# Altium PCB PCB1.PcbDoc
Units mil, origin at the board's own origin, x right, y up, seen from the top; angles counter-clockwise.
Board outline 1770 x 1750 mil, 2 copper layers (Top Layer, Bottom Layer); 34 components, 20 nets, 75 pads, 4 vias.
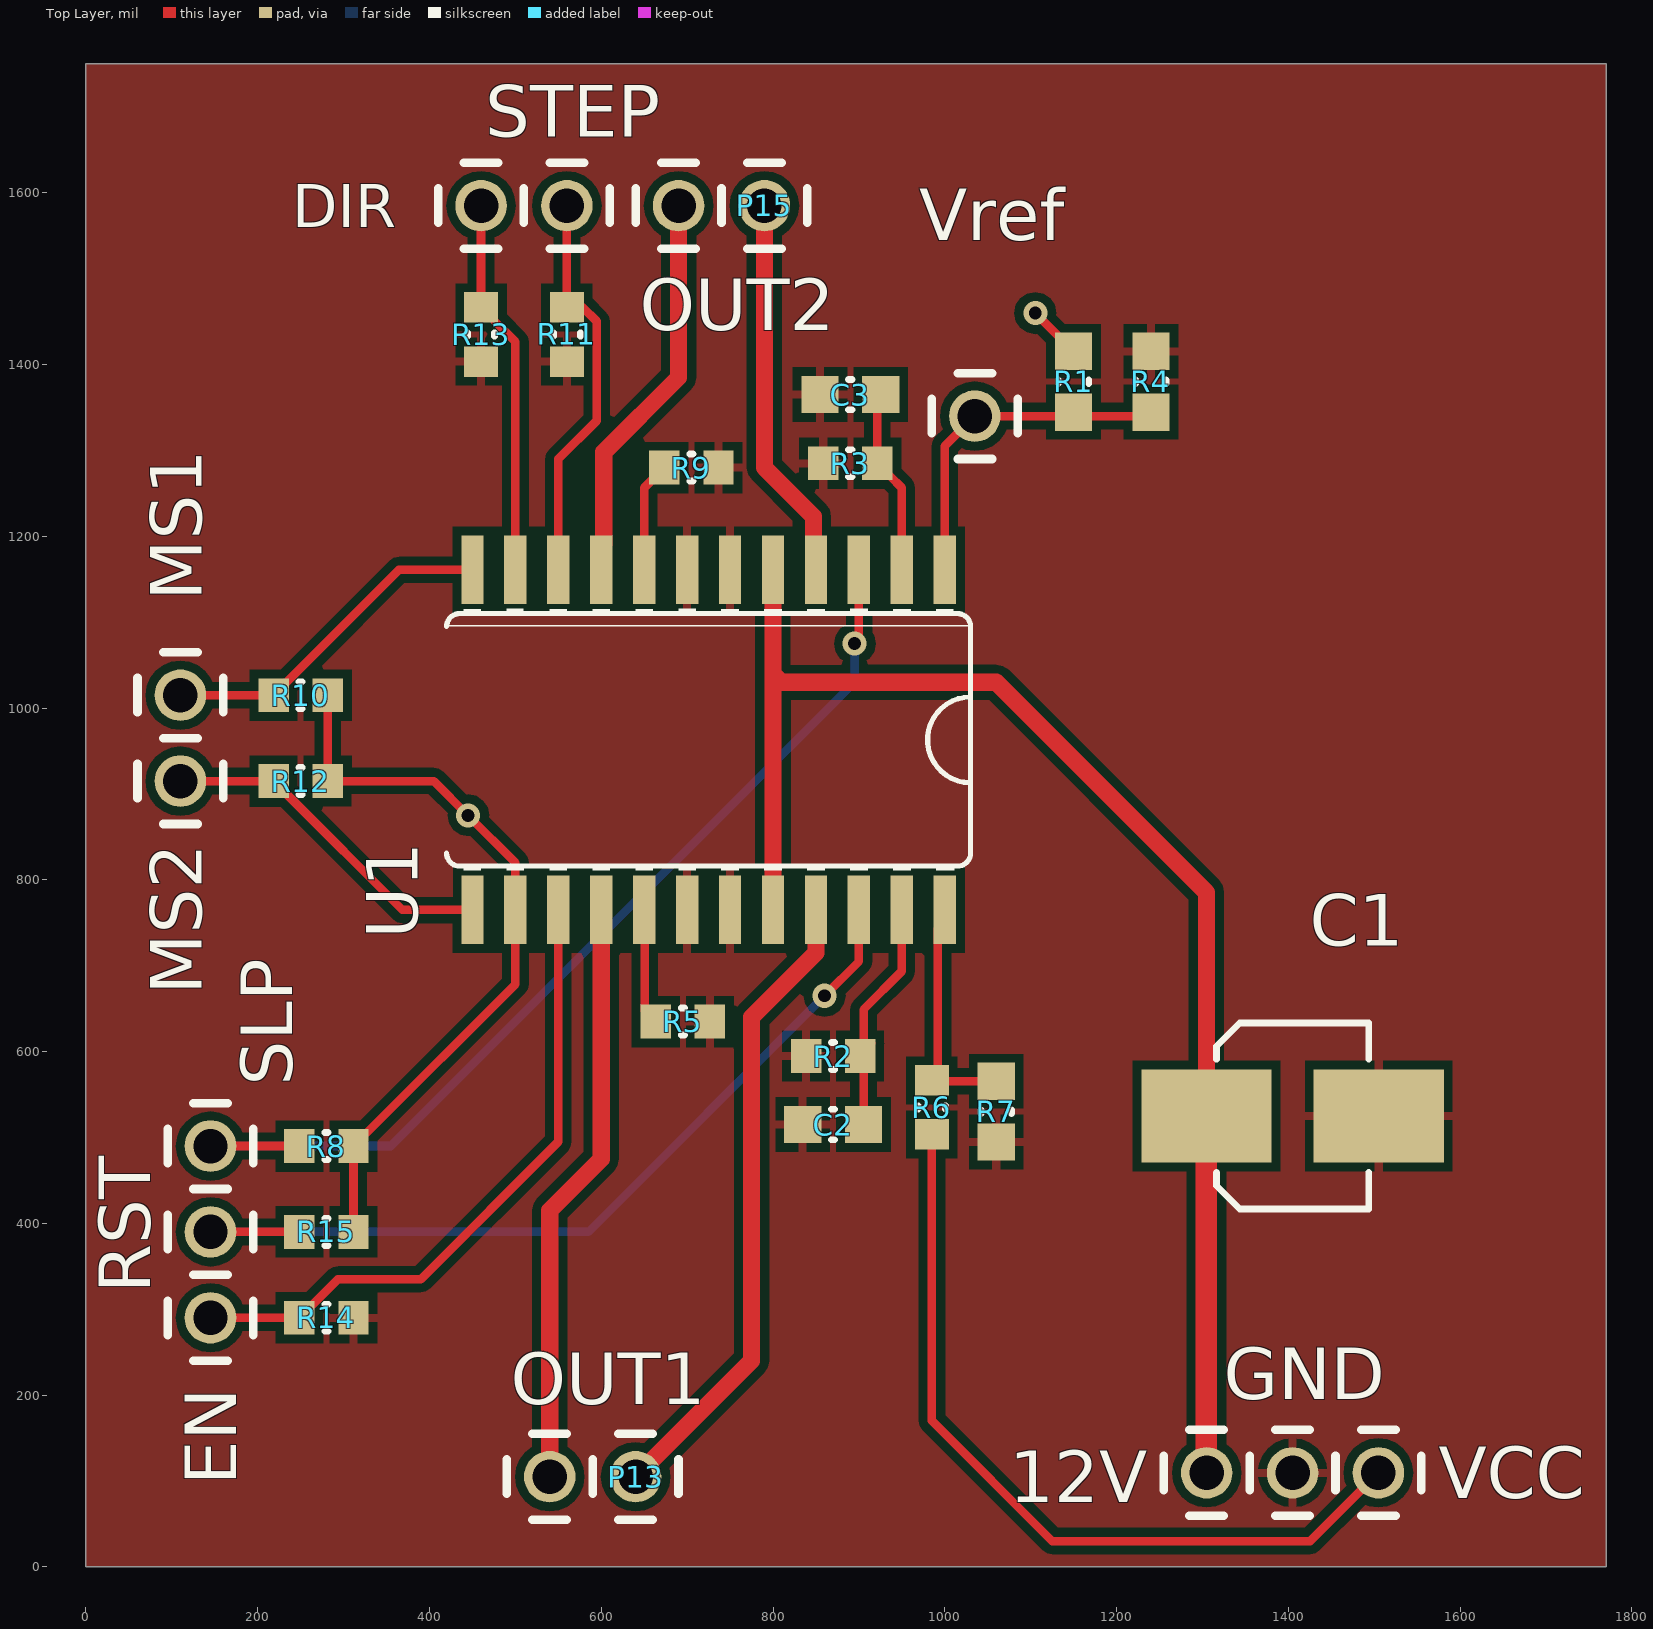
[diagram p0: Top Layer view]
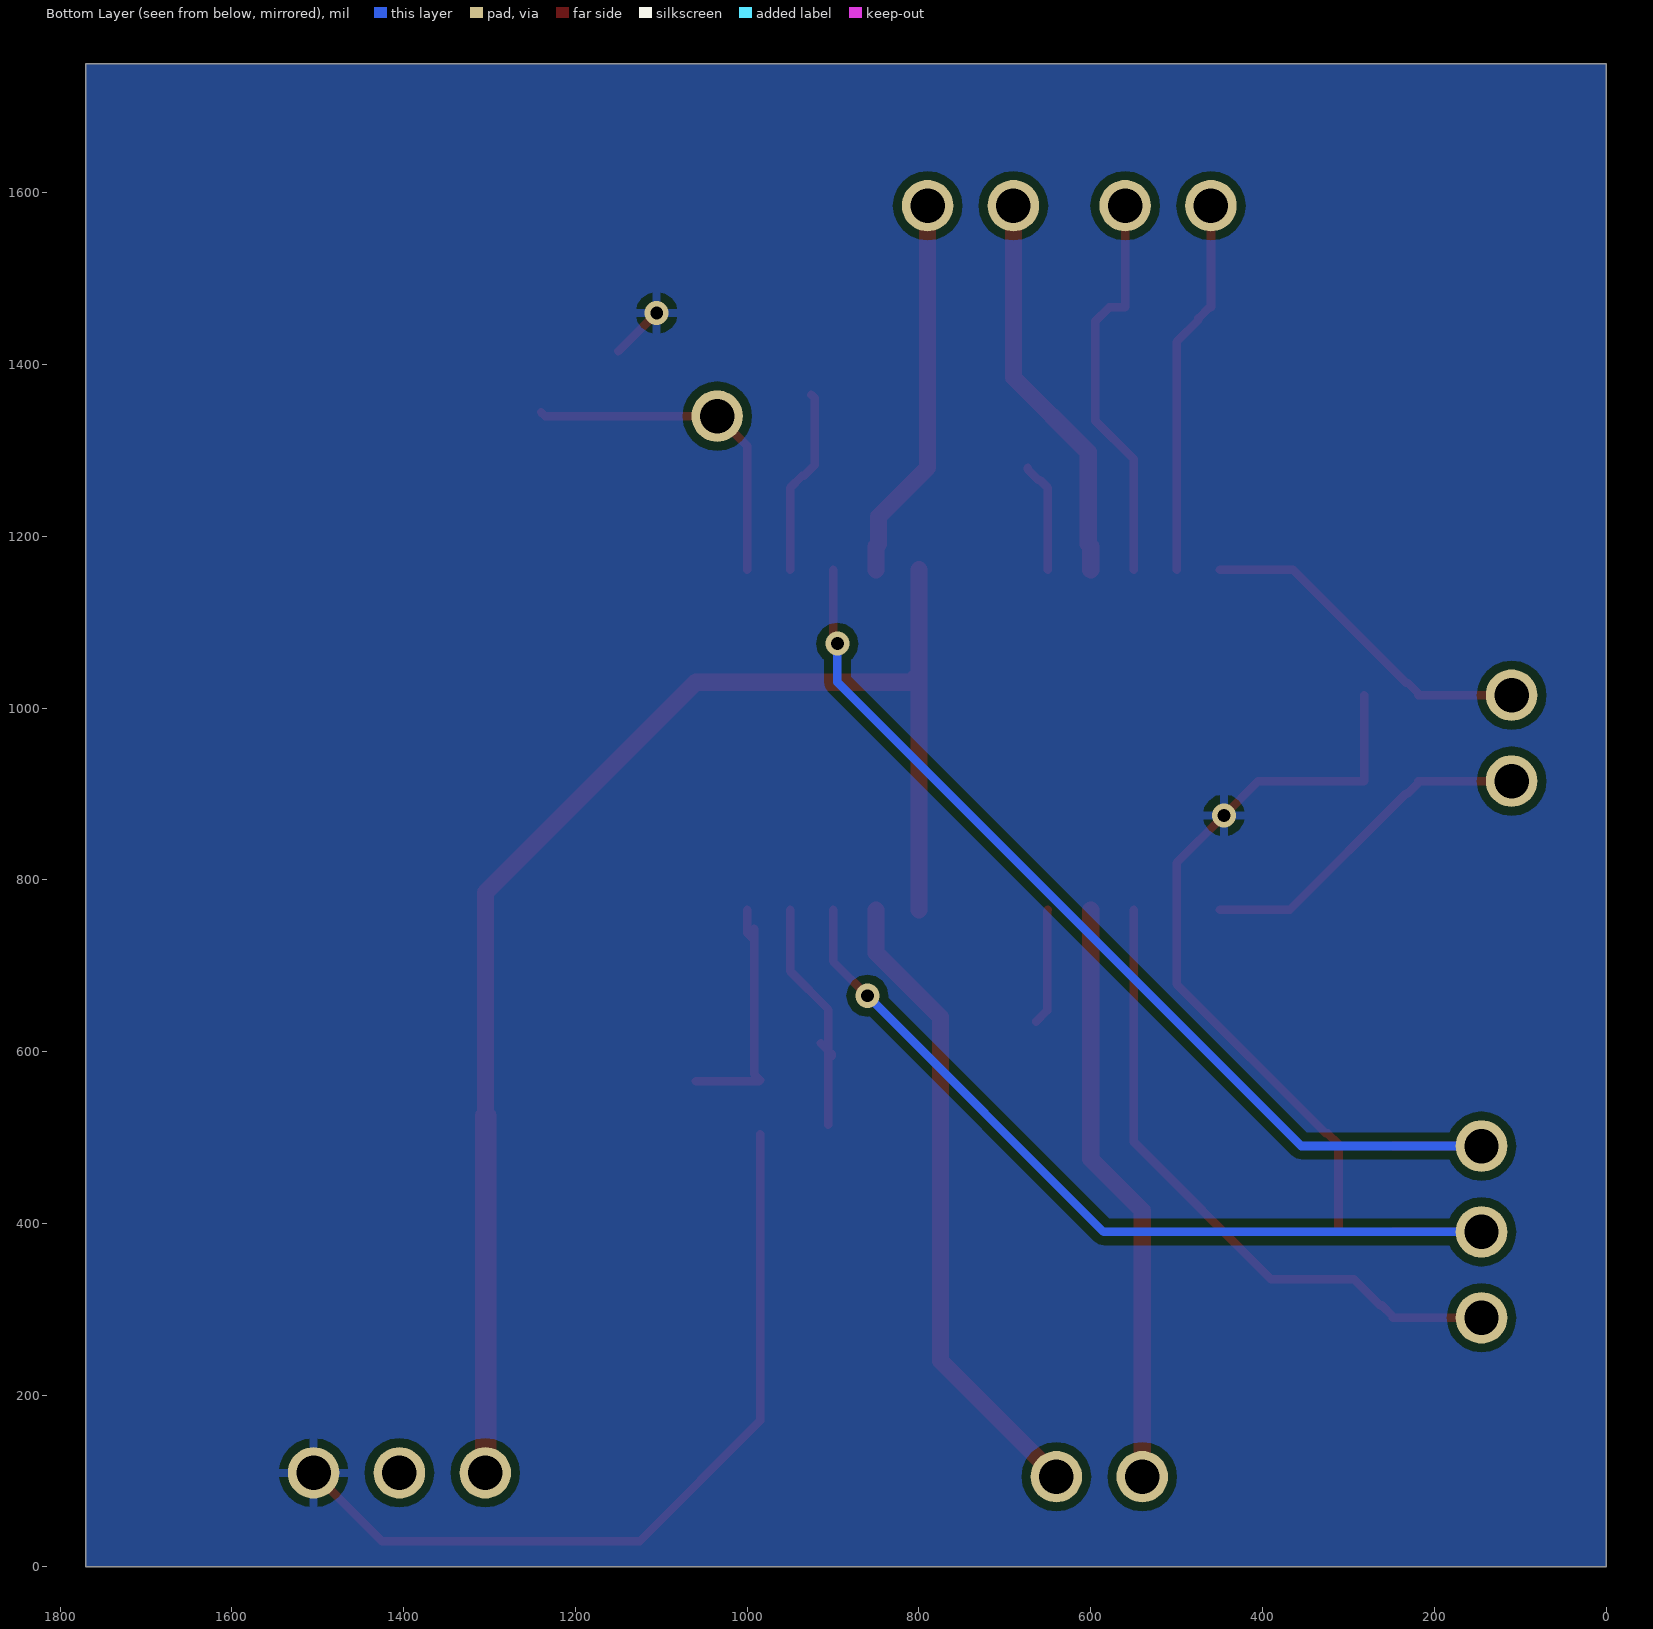
[diagram p1: Bottom Layer view, seen from below]

## Layer stack, top to bottom
Top Solder: solder mask 0.4, Solder Resist, Dk 3.5
Top Layer: signal copper 1.4
Dielectric 1: dielectric 12.6, FR-4, Dk 4.8
Bottom Layer: signal copper 1.4
Bottom Solder: solder mask 0.4, Solder Resist, Dk 3.5

## Board outline
0,0 0,1750 1770,1750 1770,0

## Design rules (kind name [scope] priority, off if disabled: settings)
Clearance [All] p1: gap=10 ignorepadtopadclearanceinfootprint=FALSE except(0: Arc-Hole Track-Hole SMDPad-Hole THPad-Hole Via-Hole Fill-Hole Poly-Hole Region-Hole Text-Hole)
ComponentClearance [All] p1 off: gap=10 collisioncheckmode=3 verticalgap=10 showdistances=FALSE
PolygonConnect [All] p1: connectstyle=Relief reliefconductorwidth=10 reliefentries=4 polygonreliefangle="90 Angle" airgapwidth=10
RoutingVias [All] p1: holewidth=28 width=50 viastyle="Through Hole" minholewidth=28 minwidth=50 maxholewidth=28 maxwidth=50
SolderMaskExpansion [All] p1: expansion=4
Width [All] p1: maxlimit=50 minlimit=10 preferedwidth=10 minimp=50.000000 maximp=50.000000 favimp=50.000000
29 further rules are at their usual default settings.

## Components (designator, comment, footprint, x,y, rotation, side; value= is the part's Value field where it differs from the comment)
12V "Pin 100mil" "Pin 100mil" 1305,109.5 r270 top (schematic designator P3)
C1 "=Value" "CAP 865080342006" 1405,525 r0 top
C2 "CAP 680pF 16V 0603(1608)" CAPC0603(1608)100_M 870,515 r0 top value=680pF
C3 "CAP 680pF 16V 0603(1608)" CAPC0603(1608)100_M 890,1365 r0 top value=680pF
DIR "Pin 100mil" "Pin 100mil" 460,1585 r0 top (schematic designator P4)
EN "Pin 100mil" "Pin 100mil" 145,290 r90 top (schematic designator P6)
GND "Pin 100mil" "Pin 100mil" 1405,109.5 r270 top (schematic designator P10)
MS1 "Pin 100mil" "Pin 100mil" 110,1015 r270 top (schematic designator P7)
MS2 "Pin 100mil" "Pin 100mil" 110,915 r270 top (schematic designator P8)
OUT1 "Pin 100mil" "Pin 100mil" 540,105 r0 top (schematic designator P11)
OUT2 "Pin 100mil" "Pin 100mil" 690,1585 r0 top (schematic designator P14)
P13 "Pin 100mil" "Pin 100mil" 640,105 r0 top
P15 "Pin 100mil" "Pin 100mil" 790,1585 r0 top
R1 "6K04 1% 0603(1608)" RESC0603(1608)_M 1150,1380 r90 top value="6040.00 Ohm"
R2 "20K 5% 0603(1608)" RESC0603(1608)_N 870,594.84 r0 top value="20000.00 Ohm"
R3 "20K 5% 0603(1608)" RESC0603(1608)_N 890,1285 r0 top value="20000.00 Ohm"
R4 "4K02 1% 0603(1608)" RESC0603(1608)_M 1240,1380 r270 top value="4020.00 Ohm"
R5 "Jumper 0603(1608)" RESC0603(1608)_N 695,635 r0 top value="0.00 Ohm"
R6 "10K 1% 0603(1608)" RESC0603(1608)_N 985,535 r270 top value="10000.00 Ohm"
R7 "6K8 1% 0603(1608)" RESC0603(1608)_M 1060,530 r90 top value="6800.00 Ohm"
R8 "10K 1% 0603(1608)" RESC0603(1608)_N 280,490 r180 top value="10000.00 Ohm"
R9 "Jumper 0603(1608)" RESC0603(1608)_N 705,1280 r0 top value="0.00 Ohm"
R10 "10K 1% 0603(1608)" RESC0603(1608)_N 250,1015 r180 top value="10000.00 Ohm"
R11 "10K 1% 0603(1608)" RESC0603(1608)_N 560,1435 r90 top value="10000.00 Ohm"
R12 "10K 1% 0603(1608)" RESC0603(1608)_N 250,915 r180 top value="10000.00 Ohm"
R13 "10K 1% 0603(1608)" RESC0603(1608)_N 460,1435 r90 top value="10000.00 Ohm"
R14 "10K 1% 0603(1608)" RESC0603(1608)_N 280,290 r180 top value="10000.00 Ohm"
R15 "10K 1% 0603(1608)" RESC0603(1608)_N 280,390 r180 top value="10000.00 Ohm"
RST "Pin 100mil" "Pin 100mil" 145,390 r90 top (schematic designator P5)
SLP "Pin 100mil" "Pin 100mil" 145,490 r90 top (schematic designator P9)
STEP "Pin 100mil" "Pin 100mil" 560,1585 r0 top (schematic designator P12)
U1 "A3967SLBTR-T" *SOIC24WIDE 725,963 r180 top
VCC "Pin 100mil" "Pin 100mil" 1505,109.5 r270 top (schematic designator P2)
Vref "Pin 100mil" "Pin 100mil" 1035,1340 r180 top (schematic designator P1)

## Footprints (in the part's own frame and the unit in brackets; to place one, negate y for a bottom-side part, rotate by r counter-clockwise, add the part's x,y. Pads: shape width x height; smd on the part's side, far side on the other; paste and mask are expansions set on the pad)
*SOIC24WIDE [mil]
  rect 26x80 smd: 1(-275,-198) 2(-225,-198) 3(-175,-198) 4(-125,-198) 5(-75,-198) 6(-25,-198) 7(25,-198) 8(75,-198) 9(125,-198) 10(175,-198) 11(225,-198) 12(275,-198) 13(275,198) 14(225,198) 15(175,198) 16(125,198) 17(75,198) 18(25,198) 19(-25,198) 20(-75,198) 21(-125,198) 22(-175,198) 23(-225,198) 24(-275,198)
  silkscreen extent -305,-153 305,152
"CAP 865080342006" [mm] "Aluminum Electrolytic Capacitor, Body 4.30x5.30x6.30mm, IPC Low Density"
  rect 3.85x2.75 smd: 1(-2.55,0) 2(2.55,0)
  silkscreen extent -2.25,-2.75 2.25,2.75, body extent -2.75,-2.75 2.75,2.75, height 6.3
CAPC0603(1608)100_M [mm] "Chip Capacitor, Body 1.6x0.8mm, Height 1.0mm, IPC Low Density"
  rect 1.1x1.1 smd: 1(-0.9,0) 2(0.9,0)
  silkscreen extent -0.05,-0.45 0.05,0.45, body extent -0.87,-0.47 0.88,0.48, height 1
"Pin 100mil" [mil]
  round 60 hole 40.16: 0(0,0)
  silkscreen extent -50,-50 50,50
RESC0603(1608)_M [mm] "Chip Resistor, Body 1.6x0.8mm, IPC Low Density"
  rect 1.1x1.1 smd: 1(-0.9,0) 2(0.9,0)
  silkscreen extent -0.05,-0.45 0.05,0.45, body extent -0.85,-0.47 0.85,0.47, height 0.6
RESC0603(1608)_N [mm] "Chip Resistor, Body 1.6x0.8mm, IPC Medium Density"
  rect 0.9x1 smd: 1(-0.8,0) 2(0.8,0)
  silkscreen extent -0.05,-0.4 0.05,0.4, body extent -0.85,-0.47 0.85,0.47, height 0.6

## Part data
12V DIR EN GND MS1 MS2 OUT1 OUT2 P13 P15 RST SLP STEP VCC Vref: library part 1-Pin
C1: library part CAP
C2 C3: library part CMP-1035-01773-1, "CAP 680pF 16V ±10% 0603 (1608 Metric) Thickness 1mm SMD", Case-EIA=0603, Case-Metric=1608, Rated Voltage="16 V", Tolerance=±10%, Max Thickness="1 mm", Technology=SMT
R1: library part CMP-1012-00598-1, "6K04 0.1W 1% 0603 (1608 Metric)  SMD", Case-EIA=0603, Case-Metric=1608, Power="0.1 W", Tolerance="1 %", Technology=SMT
R2 R3: library part CMP-1012-00105-1, "20K 0.1W 5% 0603 (1608 Metric)  SMD", Case-EIA=0603, Case-Metric=1608, Power="0.1 W", Tolerance="5 %", Technology=SMT
R4: library part CMP-1012-00578-1, "4K02 0.1W 1% 0603 (1608 Metric)  SMD", Case-EIA=0603, Case-Metric=1608, Power="0.1 W", Tolerance="1 %", Technology=SMT
R5 R9: library part CMP-1012-00001-1, "Jumper 0603 (1608 Metric)", Case-EIA=0603, Case-Metric=1608, Power=None, Technology=SMT, Tolerance=None
R6 R8 R10 R11 R12 R13 R14 R15: library part CMP-1012-00623-1, "10K 0.1W 1% 0603 (1608 Metric)  SMD", Case-EIA=0603, Case-Metric=1608, Power="0.1 W", Tolerance="1 %", Technology=SMT
R7: library part CMP-1012-00604-1, "6K8 0.1W 1% 0603 (1608 Metric)  SMD", Case-EIA=0603, Case-Metric=1608, Power="0.1 W", Tolerance="1 %", Technology=SMT
U1: "Ic Motor Driver Pwm Full 24soic - A3967slbtr-t", Package="SOIC-24 Allegro MicroSystems LLC", Digi-Key_Part_Number=620-1140-1-ND, Digi-Key_Purchase_URL=https://www.digikey.com/product-detail/en/allegro-microsystems/A3967SLBTR-T/620-1140-1-ND/1090383?utm_source=snapeda&utm_medium=aggregator&utm_campaign=symbol, MF=Allegro, MP=A3967SLBTR-T, SnapEDA_Link=https://www.snapeda.com/parts/A3967SLBTR-T/Allegro%20Industries/view-part/?ref=snap

## Via types
v1: diameter 28, hole 15, Top Layer to Bottom Layer, 4 vias

## Nets (pads, with @x,y where several pads share a name; then routed paths per layer and width w, separated by ;. In a path a pad name is that pad's centre, name@x,y a point inside that pad or via, vN(x,y) a via of type N, cw(c..) or ccw(c..) an arc to the next point about the centre after c; other vN are vias at no path point)
+12: 12V.0 C1.1 U1.5 U1.20 | length 1682.1
  Top Layer w10: 12V.0@1304.61,109.89 12V.0
  Top Layer w20: U1.20 800,1040 ; U1.5 800,1050 800,1040 ; C1.1 1304.61,785.39 1060,1030 810,1030 800,1040
  Top Layer w25: 12V.0@1304.61,109.89 C1.1
DIR: DIR.0 R13.2 U1.11 | length 441.7
  Top Layer w10: DIR.0 R13.2 461.97,1466.5 474.69,1453.78 474.69,1451.81 500,1426.5 U1.11
ENABLE: EN.0 R14.2 U1.15 | length 761.1
  Top Layer w10: EN.0 R14.2 248.5,291.97 261.22,304.69 263.19,304.69 293.5,335 390,335 550,495 U1.15
GND: C1.2 C2.1 C3.1 GND.0 R2.1 R3.1 R4.1 R5.2 R7.1 R9.2 R11.1 R13.1 R14.1 U1.6 U1.7 U1.18 U1.19
MS1: MS1.0 R10.2 U1.12 | length 401.6
  Top Layer w10: MS1.0 R10.2 218.5,1016.97 231.22,1029.69 233.19,1029.69 364.5,1161 U1.12
MS2: MS2.0 R12.2 U1.13 | length 403.3
  Top Layer w10: MS2.0 R12.2 218.5,913.03 231.22,900.31 233.19,900.31 368.5,765 U1.13
NetP1_0: R1.1 R4.2 U1.1 Vref.0 | length 400.4
  Top Layer w10: U1.1 1000,1305 Vref.0 1235.43,1340 R4.2
NetR5_1: R5.1 U1.17 | length 135.6
  Top Layer w10: U1.17 650.79,764.21 650.79,647.72 R5.1
NetR6_1: R6.1 R7.2 U1.24 | length 302.3
  Top Layer w10: U1.24 1000,738 U1.24@998.5,736.5 ; R7.2 986.06,565.43 R6.1 992,573.5 U1.24@992,730 ; U1.24@992,730 U1.24@998.5,736.5 ; U1.24@992,730 992,743 U1.24@998.5,736.5
NetR9_1: R9.1 U1.8 | length 129.9
  Top Layer w10: U1.8 650,1256.5 658.82,1265.31 660.79,1265.31 673.5,1278.03 R9.1
OUT1A: OUT1.0 U1.16 | length 684.9
  Top Layer w20: OUT1.0 540,415 600,475 U1.16
OUT1B: P13.0 U1.21 | length 747
  Top Layer w20: P13.0 775,240 775,640 850,715 U1.21
OUT2A: OUT2.0 U1.9 | length 461.3
  Top Layer w20: U1.9 600,1188 603,1191 603,1298 690,1385 OUT2.0
OUT2B: P15.0 U1.4 | length 448.9
  Top Layer w20: P15.0 790,1280 847,1223 847,1191 850,1188 U1.4
RC1: C2.2 R2.2 U1.23 | length 288.4
  Top Layer w10: R2.2 901.5,596.81 R2.2@905.43,600.75 ; C2.2 R2.2@905.43,600.75 ; R2.2@914.21,609.53 R2.2@905.43,600.75 ; U1.23 950,693.5 905.43,648.94 R2.2@905.43,600.75
RC2: C3.2 R3.2 U1.2 | length 218.6
  Top Layer w10: C3.2 921.5,1361.06 R3.2 921.5,1283.03 934.21,1270.31 936.18,1270.31 950,1256.5 U1.2
RESET: R15.2 RST.0 U1.22 | length 1049
  Top Layer w10: RST.0 R15.2 ; v1(860,665) 900,705 U1.22
  Bottom Layer w10: RST.0 585,390 v1(860,665)
SLEEP: R8.2 SLP.0 U1.3 | length 1210.3
  Top Layer w10: SLP.0 R8.2 ; v1(895,1075) 900,1080 U1.3
  Bottom Layer w10: SLP.0 355,490 895,1030 v1(895,1075)
STEP: R11.2 STEP.0 U1.10 | length 467.7
  Top Layer w10: U1.10 550,1290 594.69,1334.69 594.69,1450.31 578.5,1466.5 R11.2 STEP.0
VCC: R1.2 R6.2 R8.1 R10.1 R12.1 R15.1 U1.14 VCC.0 | length 1874.5
  Top Layer w10: R10.1 R12.1 405,915 v1(445,875) 500,820 U1.14 500,678.5 326.18,504.69 324.21,504.69 311.5,491.97 R8.1 R15.1 ; R6.2 985,170 1125,30 1425.5,30 VCC.0 ; v1(1105.43,1460) R1.2

## Polygon pours and split planes (outlines as drawn)
VCC on Bottom Layer "VCC_L02_P001" (solid, pour order 1): 0,0 0,1750 1770,1750 1770,0
GND on Top Layer "GND_L01_P000" (solid, pour order 0): 0,0 0,1750 1770,1750 1770,0

## Silkscreen, mask and mechanical layers (free items; w line width, h text height)
Mechanical 1:
  the board outline again, w10